# Altium PCB RX_137.PcbDoc
Units mm, origin at the board's own origin, x right, y up, seen from the top; angles counter-clockwise.
Board outline 69.85 x 63.5 mm, 2 copper layers (Top Layer, Bottom Layer); 57 components, 72 nets, 235 pads, 50 vias.
Unrouted connection lines stored in the file: 7.
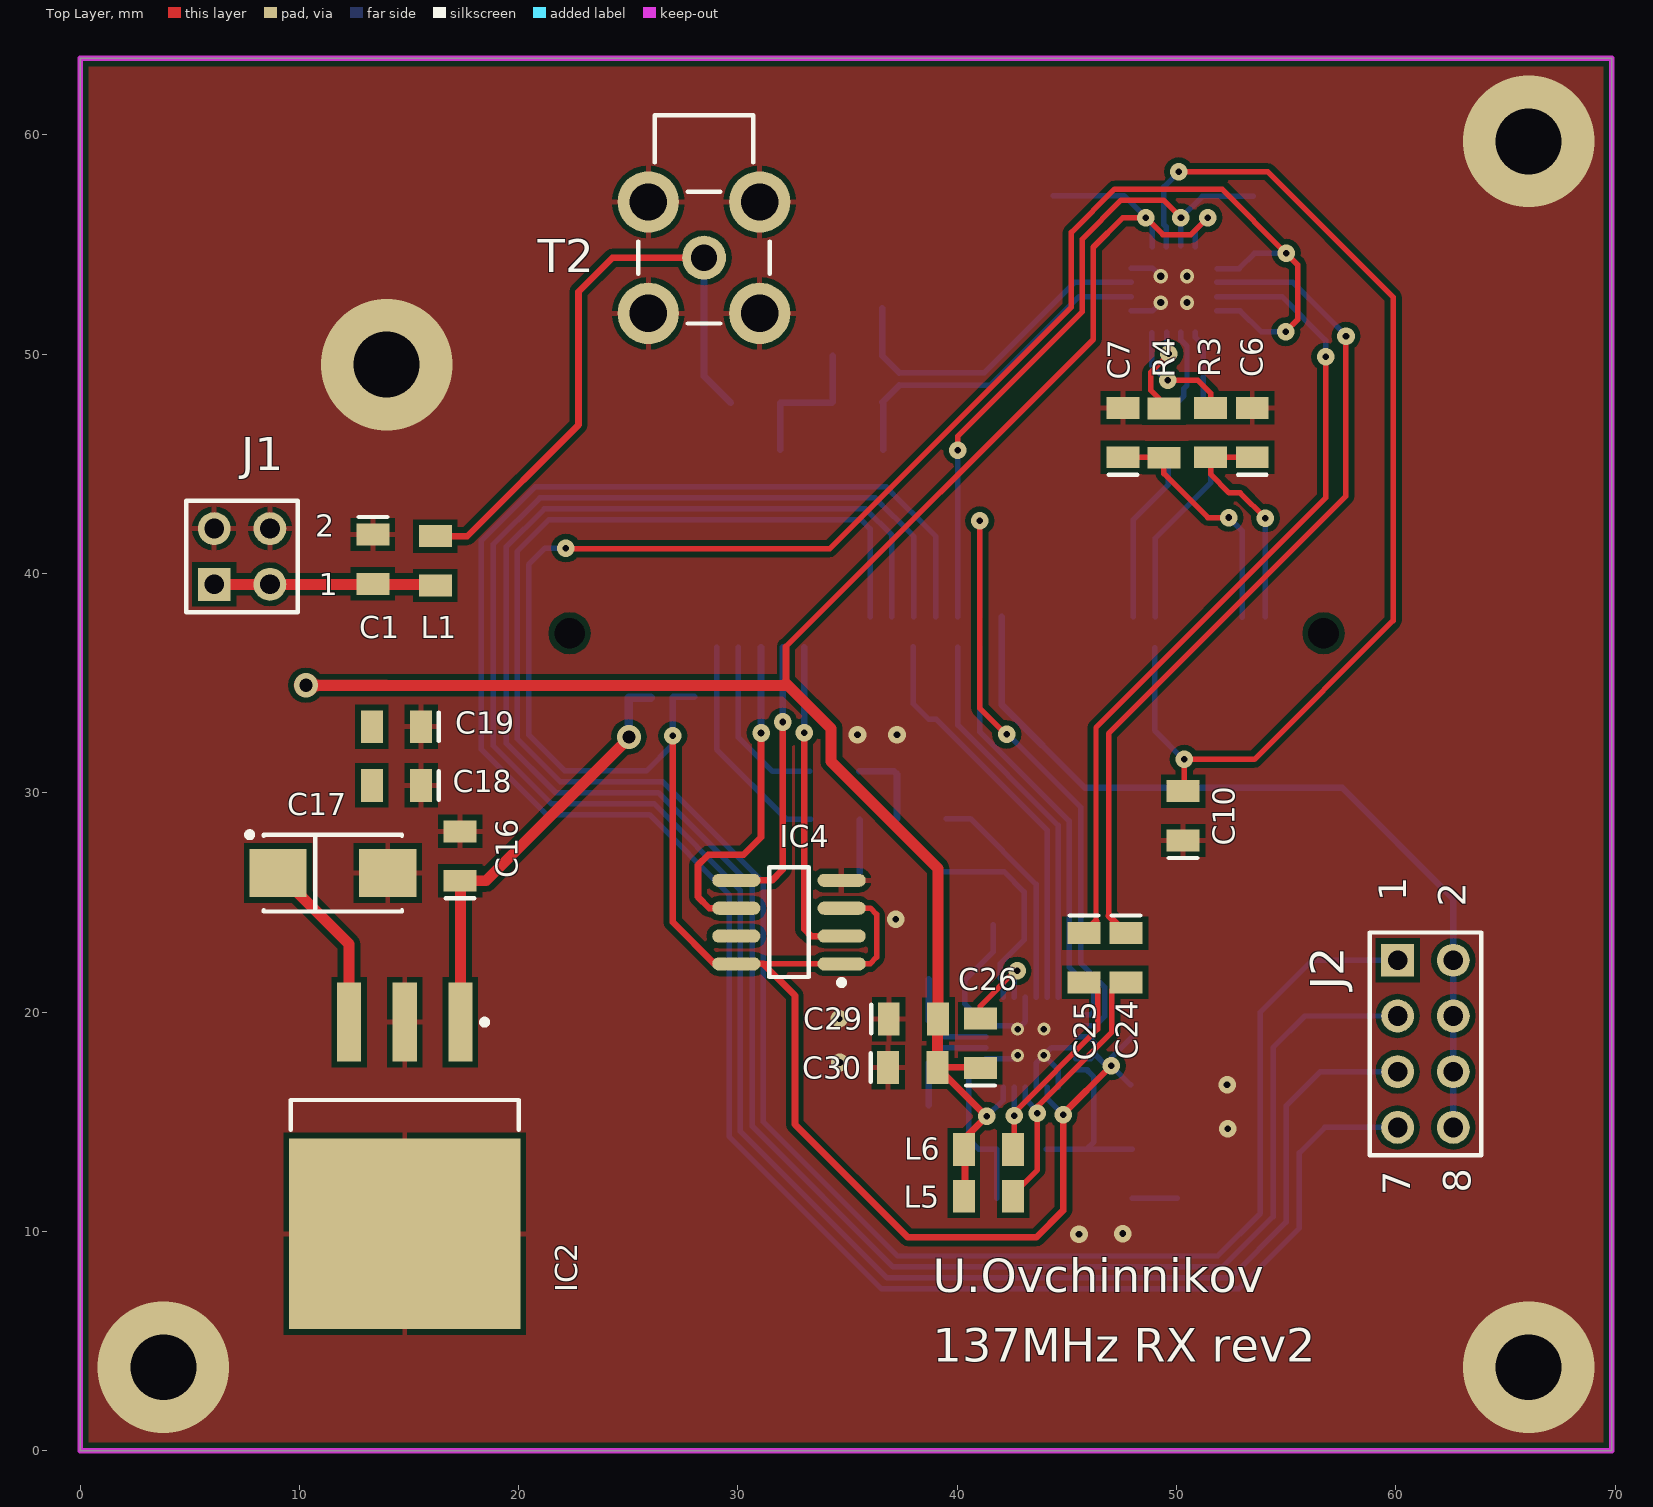
[diagram p0: Top Layer view]
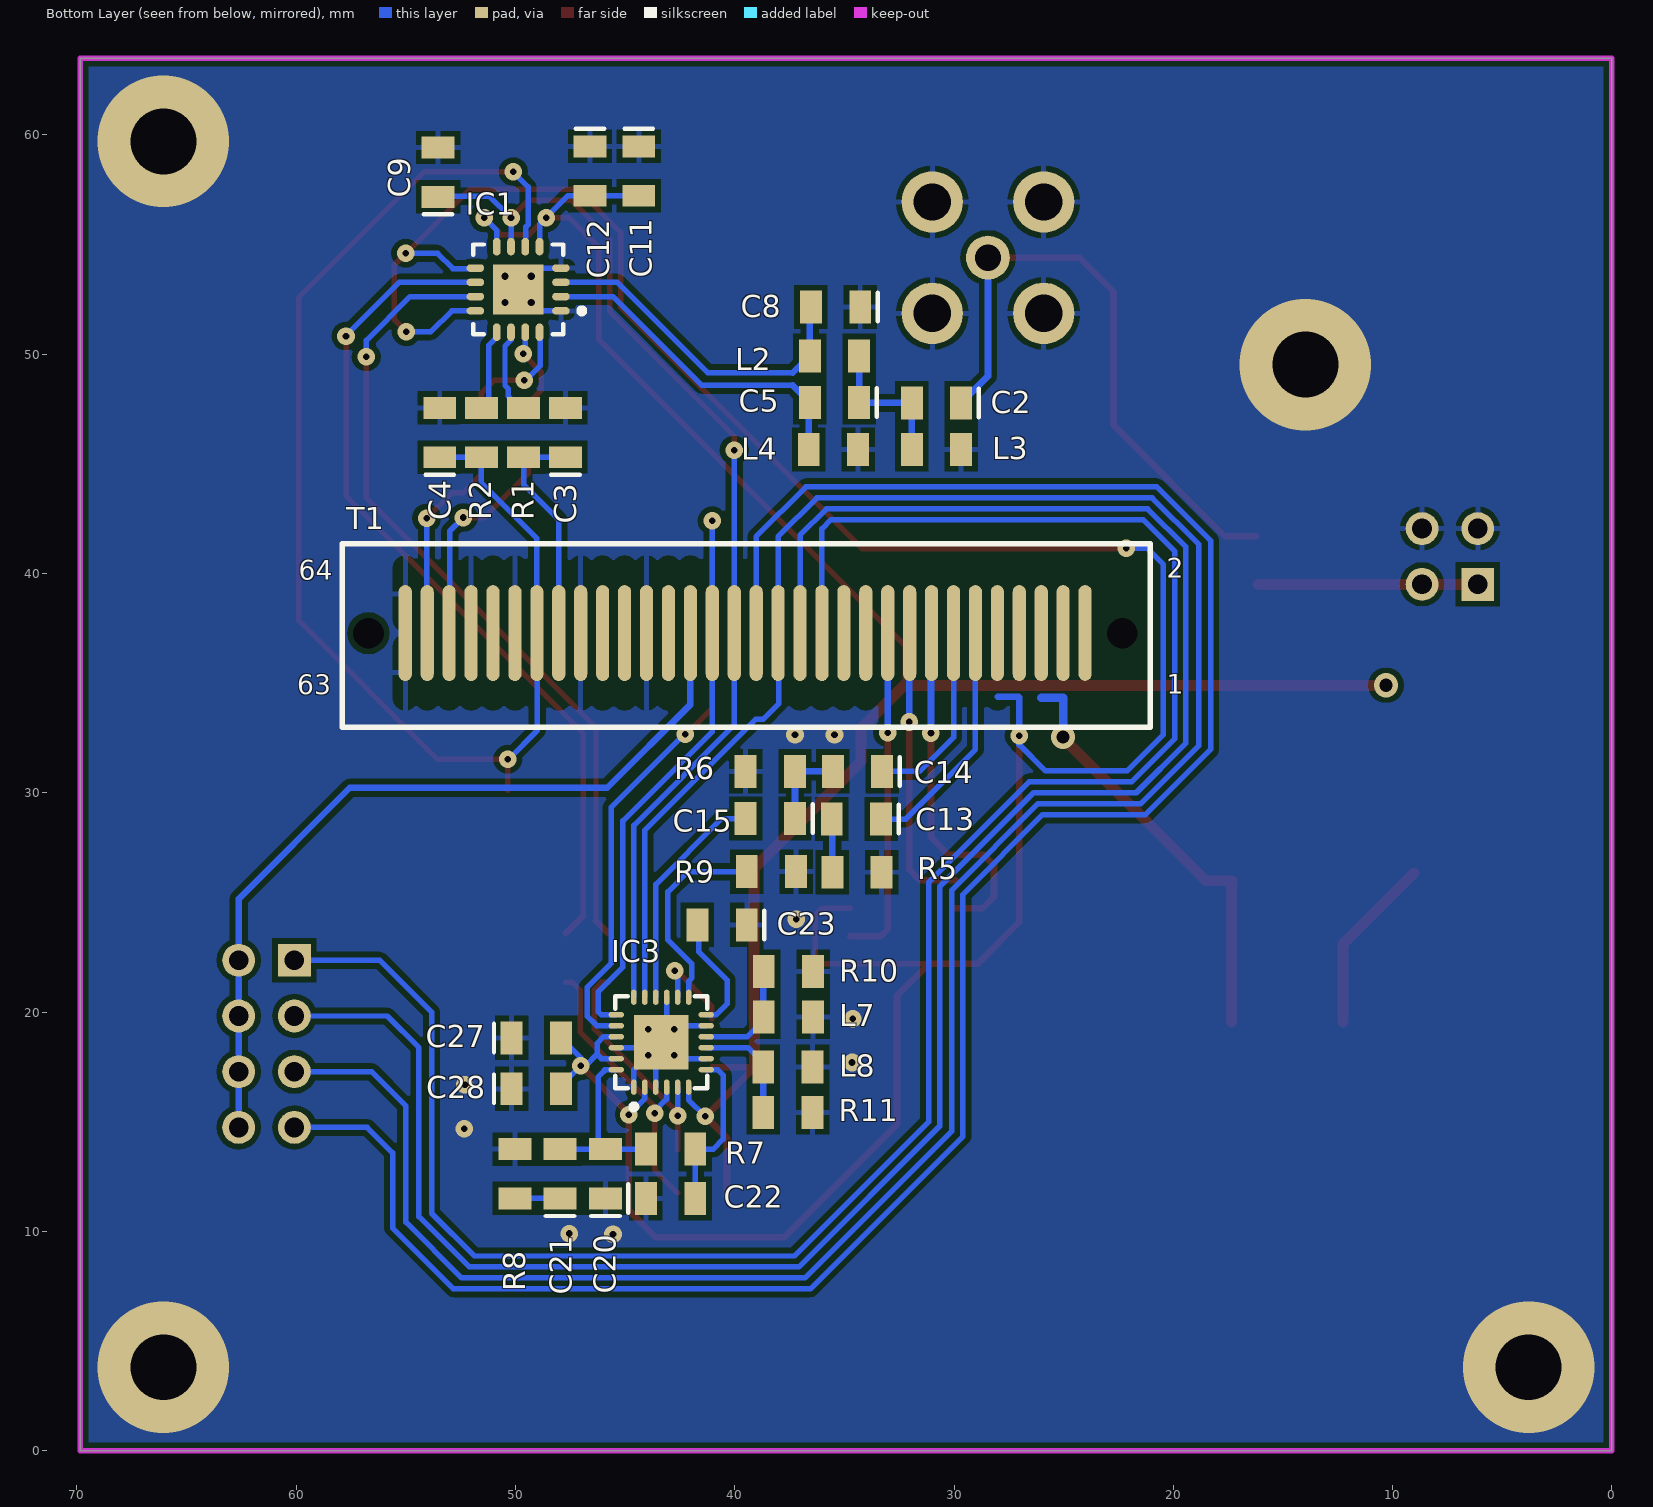
[diagram p1: Bottom Layer view, seen from below]
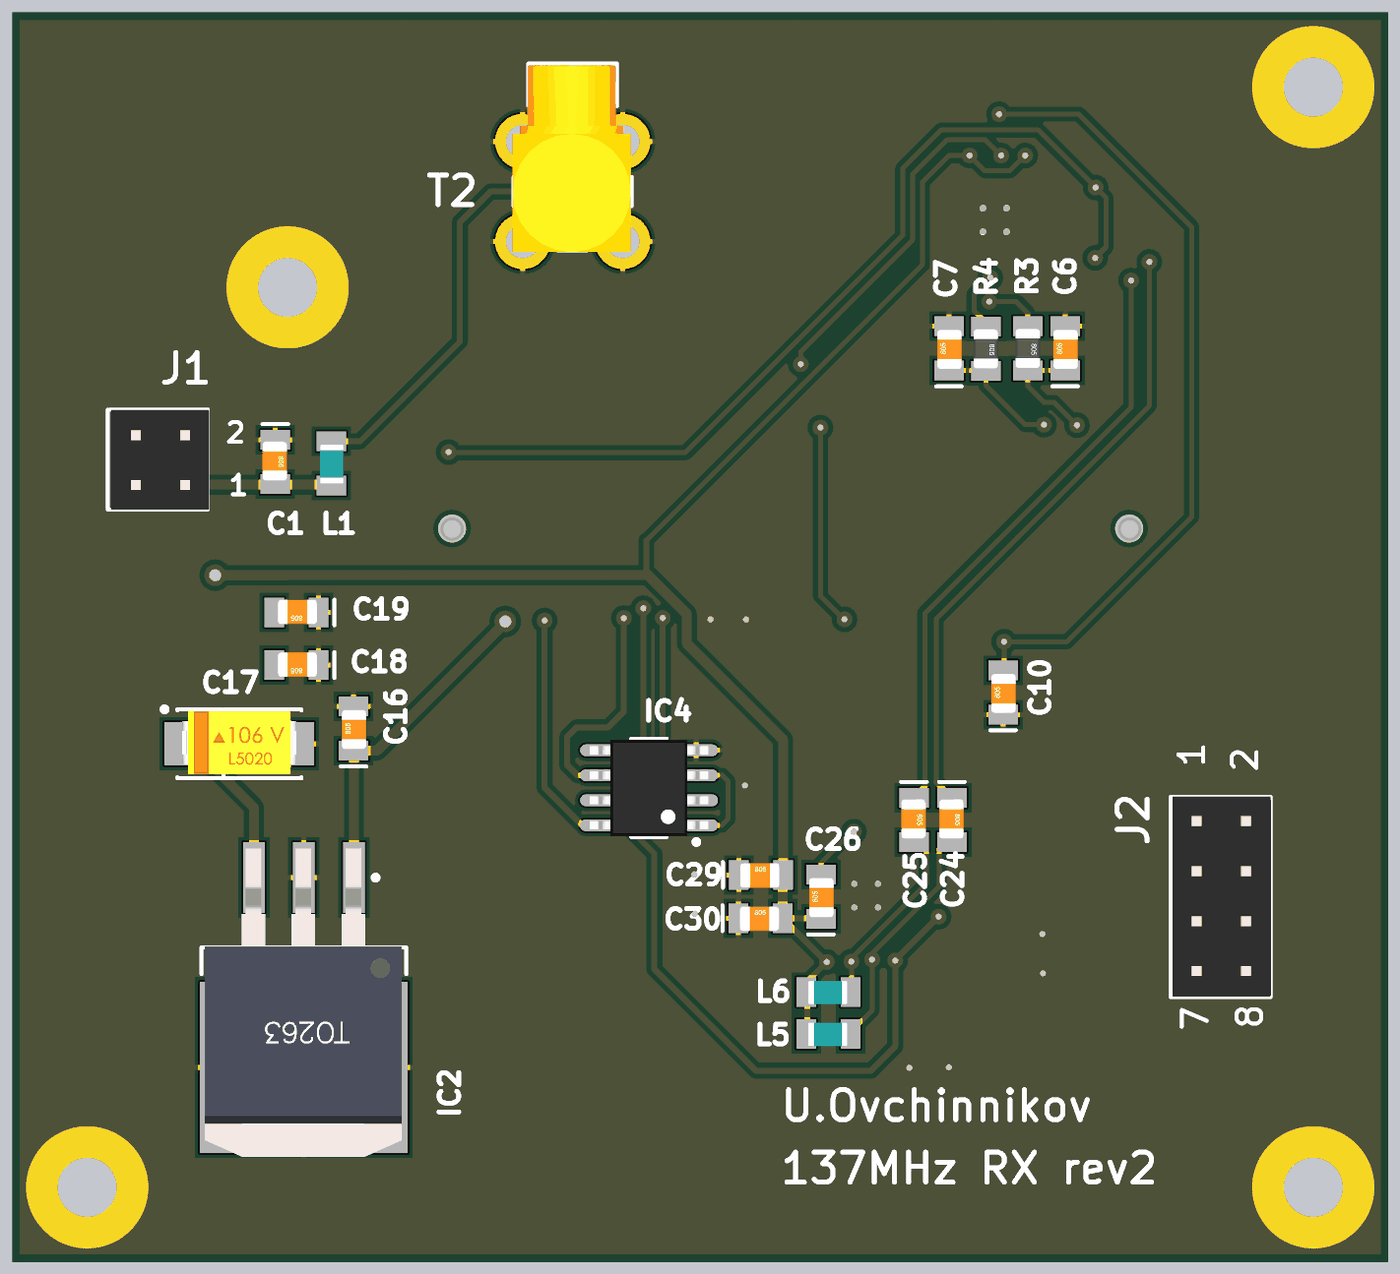
[diagram p2: 3D render of the assembled board from above, using the file's embedded part models]
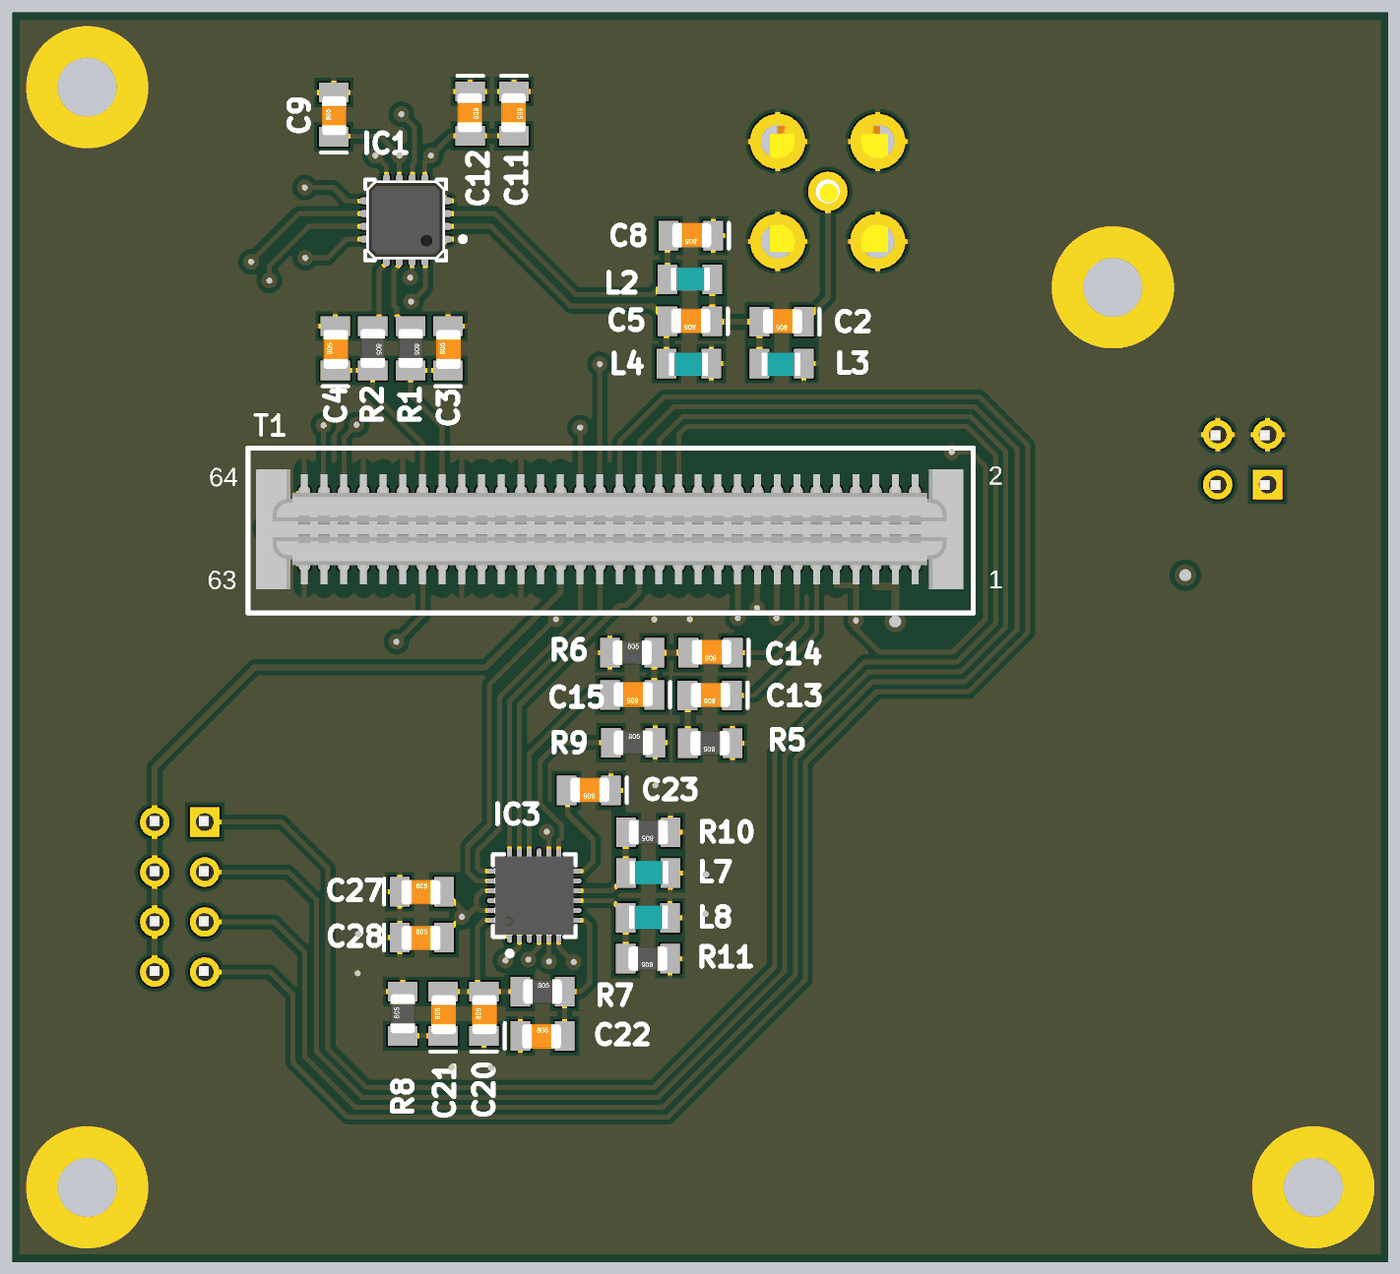
[diagram p3: 3D render of the assembled board from below, using the file's embedded part models]

## Layer stack, top to bottom
Top Solder: solder mask 0.0102, Solder Resist, Dk 3.5
Top Layer: signal copper 0.0356
Dielectric 1: dielectric 0.32, FR-4, Dk 4.8
Bottom Layer: signal copper 0.0356
Bottom Solder: solder mask 0.0102, Solder Resist, Dk 3.5

## Board outline
0,0 69.85,0 69.85,63.5 0,63.5

## Design rules (kind name [scope] priority, off if disabled: settings)
Clearance [All] p1: gap=0.25
PlaneClearance [All] p1: clearance=0.25
PlaneConnect [All] p1: planeconnectstyle=Relief reliefexpansion=0.3 reliefentries=4 reliefconductorwidth=0.35 reliefairgap=0.25
PolygonConnect Via [isVia] p1: connectstyle=Direct reliefconductorwidth=0.254 reliefentries=4 polygonreliefangle="90 Angle" airgapwidth=0.254
PolygonConnect [All] p2: connectstyle=Relief reliefconductorwidth=0.25 reliefentries=4 polygonreliefangle="90 Angle" airgapwidth=0.25
RoutingVias RoutingVias_1 [All] p1: holewidth=0.3 width=0.7 viastyle="Through Hole" minholewidth=0.3 minwidth=0.7 maxholewidth=0.6 maxwidth=1
RoutingVias Power [InNetClass('Power')] p2: holewidth=0.5 width=0.8 viastyle="Through Hole" minholewidth=0.3 minwidth=0.7 maxholewidth=0.6 maxwidth=1
SolderMaskExpansion [All] p1: expansion=0.102
Width [InNetClass('Power')] p1: maxlimit=0.5 minlimit=0.25 preferedwidth=0.4 minimp=50.000000 maximp=50.000000 favimp=50.000000
Width def [All] p2: maxlimit=0.3 minlimit=0.25 preferedwidth=0.25 minimp=50.000000 maximp=50.000000 favimp=50.000000
28 further rules are at their usual default settings.

## Classes and differential pairs
net class Power: "3_3V RF:1" 6V:1 AGND:1 NetC1_2 NetC2_1

## Components (designator, comment, footprint, x,y, rotation, side; value= is the part's Value field where it differs from the comment)
C1 "1uF" "0805 cap" 13.35,40.675 r270 top
C2 "220pF" "0805 cap" 30.775,47.775 r0 bottom
C3 "220pF" "0805 cap" 47.725,46.4 r90 bottom
C4 "220pF" "0805 cap" 53.45,46.4 r90 bottom
C5 "10,6pF" "0805 cap" 35.425,47.8 r0 bottom
C6 "220pF" "0805 cap" 53.45,46.4 r90 top
C7 "220pF" "0805 cap" 47.55,46.4 r90 top
C8 "10,6pF" "0805 cap" 35.375,52.15 r0 bottom
C9 "220pF" "0805 cap" 53.525,58.275 r90 bottom
C10 "1,5nF" "0805 cap" 50.3,28.925 r90 top
C11 "1uF" "0805 cap" 44.375,58.375 r270 bottom
C12 "1nF" "0805 cap" 46.6,58.375 r270 bottom
C13 "1000pF" "0805 cap" 34.425,28.8 r0 bottom
C14 "1000pF" "0805 cap" 34.375,30.975 r0 bottom
C15 "1000pF" "0805 cap" 38.35,28.825 r0 bottom
C16 "0,1uF" "0805 cap" 17.328,27.087 r90 top
C17 "22uF" "capacitor C" 11.528,26.337 r0 top
C18 "0,1uF" "0805 cap" 14.453,30.337 r180 top
C19 "220pF" "0805 cap" 14.453,33.012 r180 top
C20 "47pF" "0805 cap" 45.9,12.6 r90 bottom
C21 "680pF" "0805 cap" 47.975,12.6 r90 bottom
C22 "22nF" "0805 cap" 42.95,11.5 r180 bottom
C23 "1nF" "0805 cap" 40.55,23.975 r0 bottom
C24 "100pF" "0805 cap" 47.7,22.5 r270 top
C25 "100pF" "0805 cap" 45.775,22.5 r270 top
C26 "10uF" "0805 cap" 41.05,18.55 r90 top
C27 "1uF" "0805 cap" 49.075,18.825 r180 bottom
C28 "1nF" "0805 cap" 49.075,16.5 r180 bottom
C29 "1uF" "0805 cap" 37.975,19.675 r0 top
C30 "1nF" "0805 cap" 37.95,17.475 r0 top
IC1 "LT5506" QFN65P400X400X80-16N 49.875,52.95 r0 bottom
IC2 "LM3940" TO-263 14.803,15.937 r270 top
IC3 "ADF4360-8" QFN50P408X408X100-24N 43.35,18.625 r90 bottom
IC4 "24lc024" SOIC_SN8 32.325,24.1 r180 top
J1 "header 2x2" "pld 2x2" 7.375,40.775 r0 top
J2 "header 4x2" H_4x2 61.35,21.1 r270 top
L1 "479nH" "inductor 0805" 16.2,40.55 r90 top
L2 "106nH" "inductor 0805" 35.425,49.925 r0 bottom
L3 "479nH" "inductor 0805" 30.825,45.65 r180 bottom
L4 "106nH" "inductor 0805" 35.525,45.65 r180 bottom
L5 "56nH" "inductor 0805" 41.4,11.6 r0 top
L6 "56nH" "inductor 0805" 41.4,13.725 r0 top
L7 "68nH" "inductor 0805" 37.525,19.775 r0 bottom
L8 "68nH" "inductor 0805" 37.55,17.5 r0 bottom
R1 "51R" "0805 resistor" 49.625,46.45 r270 bottom
R2 "51R" "0805 resistor" 51.55,46.45 r270 bottom
R3 "51R" "0805 resistor" 51.55,46.45 r270 top
R4 "51R" "0805 resistor" 49.425,46.425 r270 top
R5 "50" "0805 resistor" 34.4,26.375 r0 bottom
R6 "50" "0805 resistor" 38.4,30.975 r180 bottom
R7 "15k" "0805 resistor" 42.95,13.75 r180 bottom
R8 "6,8k" "0805 resistor" 50.025,12.6 r90 bottom
R9 "4,7k" "0805 resistor" 38.35,26.4 r180 bottom
R10 "479R" "0805 resistor" 37.525,21.85 r0 bottom
R11 "470R" "0805 resistor" 37.55,15.425 r0 bottom
T1 "Female 64 pin" "64pin female Mezzanine" 39.475,37.425 r0 bottom
T2 "mcx_connect" mcx_ra 28.45,54.4 r270 top

## Footprints (in the part's own frame and the unit in brackets; to place one, negate y for a bottom-side part, rotate by r counter-clockwise, add the part's x,y. Pads: shape width x height; smd on the part's side, far side on the other; paste and mask are expansions set on the pad)
"64pin female Mezzanine" [mm]
  round 0 hole 1.4: 0(-17.15,0.15) 0(17.225,0.15)
  oval 0.6x3 smd: 1(-15.45,0.825) 3(-14.452,0.832) 5(-13.454,0.832) 7(-12.453,0.832) 9(-11.452,0.832) 11(-10.454,0.832) 13(-9.453,0.832) 15(-8.452,0.832) 17(-7.454,0.832) 19(-6.453,0.832) 21(-5.453,0.832) 23(-4.452,0.832) 25(-3.454,0.832) 27(-2.453,0.832) 29(-1.452,0.832) 31(-0.454,0.832) 33(0.547,0.832) 35(1.548,0.832) 37(2.546,0.832) 39(3.547,0.832) 41(4.547,0.832) 43(5.548,0.832) 45(6.546,0.832) 47(7.547,0.832) 49(8.548,0.832) 51(9.546,0.832) 53(10.547,0.832) 55(11.548,0.832) 57(12.546,0.832) 59(13.547,0.832) 61(14.547,0.832) 63(15.548,0.832)
  oval 0.6x3 smd paste+0: 2(-15.453,-0.547) 4(-14.452,-0.547) 6(-13.454,-0.547) 8(-12.453,-0.547) 10(-11.452,-0.547) 12(-10.454,-0.547) 14(-9.453,-0.547) 16(-8.452,-0.547) 18(-7.454,-0.547) 20(-6.453,-0.547) 22(-5.453,-0.547) 24(-4.452,-0.547) 26(-3.454,-0.547) 28(-2.453,-0.547) 30(-1.452,-0.547) 32(-0.454,-0.547) 34(0.547,-0.547) 36(1.548,-0.547) 38(2.546,-0.547) 40(3.547,-0.547) 42(4.547,-0.547) 44(5.548,-0.547) 46(6.546,-0.547) 48(7.547,-0.547) 50(8.548,-0.547) 52(9.546,-0.547) 54(10.547,-0.547) 56(11.548,-0.547) 58(12.546,-0.547) 60(13.547,-0.547) 62(14.547,-0.547) 64(15.548,-0.547)
  silkscreen extent -18.41,-3.94 18.41,4.44, body extent -17.9,-2.87 18,3.23, height 5.31
"0805 cap" [mm]
  rect 1x1.5 smd: 1(-1.1,0) 2(1.15,0)
  silkscreen extent -1.9,-0.65 -1.9,0.65, body extent -1.03,-0.65 0.97,0.6, height 0.78
"0805 resistor" [mm]
  rect 1x1.5 smd: 1(-1.1,0) 2(1.15,0)
  body extent -0.97,-0.63 1.03,0.62, height 0.78
"capacitor C" [mm]
  rect 2.6x2.2 smd: 1(-2.5,0) 2(2.5,0)
  silkscreen extent -3.92,-1.75 3.15,1.87, body extent -2.9,-1.55 2.9,1.65, height 2.6
H_4x2 [mm]
  rect 1.5x1.5 hole 0.9: 1(-1.26,-1.27)
  round 1.5 hole 0.9: 2(-1.26,1.27) 3(1.28,-1.27) 4(1.28,1.27) 5(3.82,-1.27) 6(3.82,1.27) 7(6.36,-1.27) 8(6.36,1.27)
  silkscreen extent -2.53,-2.54 7.63,2.54, body extent -2.56,-2.45 7.6,2.55, height 8.5
"inductor 0805" [mm]
  rect 1x1.5 smd: 1(-1.1,0) 2(1.15,0)
  body extent -1,-0.63 1,0.57, height 1.3
mcx_ra [mm]
  round 2 hole 1.2: 1(0,0)
  round 2.8 hole 1.7: 2(-2.54,-2.54) 3(2.54,-2.54) 4(2.54,2.54) 5(-2.54,2.54)
  silkscreen extent -6.5,-3 3,3, body extent -6.43,-3.05 3.07,2.95, height 5.9
"pld 2x2" [mm]
  rect 1.5x1.5 hole 0.9: 1(-1.26,-1.27)
  round 1.5 hole 0.9: 2(-1.26,1.27) 3(1.28,-1.27) 4(1.28,1.27)
  silkscreen extent -2.53,-2.54 2.55,2.54, body extent -2.37,-2.55 2.63,2.53, height 8.5
QFN50P408X408X100-24N [mm] "QFN, 24-Leads, Body 4,2x4,2mm (max), Pitch 0,50mm, IPC Medium Density"
  oval 0.7x0.25 smd: 1(-2.05,1.25) 2(-2.05,0.75) 3(-2.05,0.25) 4(-2.05,-0.25) 5(-2.05,-0.75) 6(-2.05,-1.25) 13(2.05,-1.25) 14(2.05,-0.75) 15(2.05,-0.25) 16(2.05,0.25) 17(2.05,0.75) 18(2.05,1.25)
  oval 0.25x0.7 smd: 7(-1.25,-2.05) 8(-0.75,-2.05) 9(-0.25,-2.05) 10(0.25,-2.05) 11(0.75,-2.05) 12(1.25,-2.05) 19(1.25,2.05) 20(0.75,2.05) 21(0.25,2.05) 22(-0.25,2.05) 23(-0.75,2.05) 24(-1.25,2.05)
  rect 2.5x2.5 smd: 25(0,0)
  silkscreen extent -3.07,-2.1 2.1,2.1, body extent -2,-2 2,2, height 1
QFN65P400X400X80-16N [mm] "QFN, 16-Leads, Body 4,1x4,1mm (max), Pitch 0,65mm, IPC Medium Density"
  oval 0.8x0.35 smd: 1(-1.95,0.975) 2(-1.95,0.325) 3(-1.95,-0.325) 4(-1.95,-0.975) 9(1.95,-0.975) 10(1.95,-0.325) 11(1.95,0.325) 12(1.95,0.975)
  oval 0.35x0.8 smd: 5(-0.975,-1.95) 6(-0.325,-1.95) 7(0.325,-1.95) 8(0.975,-1.95) 13(0.975,1.95) 14(0.325,1.95) 15(-0.325,1.95) 16(-0.975,1.95)
  rect 2.3x2.3 smd: 17(0,0)
  silkscreen extent -3.02,-2.05 2.05,2.05, body extent -2.05,-2.05 2.05,2.05, height 0.85
SOIC_SN8 [mm]
  oval 2.2x0.6 smd: 1(-2.4,1.905) 2(-2.4,0.635) 3(-2.4,-0.635) 4(-2.4,-1.905) 5(2.4,-1.905) 6(2.4,-0.635) 7(2.4,0.635) 8(2.4,1.905)
  silkscreen extent -2.53,-2.5 0.9,2.88, body extent -3,-2.45 3,2.45, height 1.75
TO-263 [mm]
  rect 3.6x1.1 smd: 1(-3.6,2.54) 2(-3.6,0) 3(-3.6,-2.54)
  rect 8.7x10.55 smd: 4(6.05,0)
  silkscreen extent -3.72,-5.2 1.3,5.2, body extent -5.08,-5.2 10.59,5.2, height 4.86

## Part data
C1 C2 C3 C4 C5 C6 C7 C8 C9 C10 C11 C12 C13 C14 C15 C16 C18 C19 C20 C21 C22 C23 C24 C25 C26 C27 C28 C29 C30: library part "ceramic capacitor"
C17: library part "tantalum capacitor"
IC1: "40MHz to 500MHz  Quadrature Demodulator  with VGA"
IC3: "Integrated Synthesizer and VCO"
L1 L2 L3 L4 L5 L6 L7 L8: library part inductor
R1 R2 R3 R4 R5 R6 R7 R8 R9 R10 R11: library part resistor

## Via types
v1: diameter 0.8, hole 0.3, Top Layer to Bottom Layer, tented both sides, 36 vias
v2: diameter 0.66, hole 0.33, Top Layer to Bottom Layer, tented top, 4 vias
v3: diameter 0.6, hole 0.3, Top Layer to Bottom Layer, tented top, 4 vias
v4: diameter 6, hole 3, Top Layer to Bottom Layer, 4 vias
v5: diameter 1.1, hole 0.6, Top Layer to Bottom Layer, tented both sides, 2 vias

## Nets (pads, with @x,y where several pads share a name; then routed paths per layer and width w, separated by ;. In a path a pad name is that pad's centre, name@x,y a point inside that pad or via, vN(x,y) a via of type N, cw(c..) or ccw(c..) an arc to the next point about the centre after c; other vN are vias at no path point)
"3_3V RF:1": C11.2 C12.2 C17.1 C18.2 C19.2 C26.1 C29.2 C30.2 IC1.5 IC1.8 IC2.3 IC3.6 L5.1 L6.1 | length 100.8
  Top Layer w0.25: 32.187,36.662 46.2,50.675 46.2,54.875 47.55,56.225 v1(48.6,56.225) 49.375,55.45 50.65,55.45 v1(51.425,56.225)
  Top Layer w0.3: 32.187,34.987 32.187,36.662 ; L5.1@40.35,11.6 40.35,14.25 41.338,15.238 C30.2 C26.1@41.025,17.475
  Top Layer w0.5: C17.1 12.263,23.102 IC2.3 ; v5(10.3,34.9) 32.1,34.9 ; 32.187,34.987 34.25,32.925 34.25,31.425 39.125,26.55 C29.2 ; C30.2 C29.2@39.1,19.65
  Bottom Layer w0.25: v1(41.35,15.25) 42.1,16 IC3.6 ; C11.2 C12.2 47.6,57.225 v1(48.6,56.225) 48.9,55.925 IC1.5 ; IC1.8 50.85,55.65 v1(51.425,56.225)
6V:1: C16.1 IC2.1 T1.3 T1.5 | length 19.7
  Top Layer w0.3: v5@25.025,32.5 v5(25.025,32.55)
  Top Layer w0.5: IC2.1 17.343,25.972 C16.1 18.512,25.987 v5@25.025,32.5
  Bottom Layer w0.3: v5@25.023,32.548 25.022,32.55 v5(25.025,32.55)
  Bottom Layer w0.4: v5@25.023,32.548 25.023,34.331 26.021,34.331
AGND:1: C1.1 C3.2 C4.2 C6.2 C7.2 C8.1 C9.2 C10.1 C11.1 C12.1 C16.2 C17.2 C18.1 C19.1 C20.1 C22.1 C23.1 C27.1 C28.1 C29.1 C30.1 IC1.1 IC1.4 IC1.17 IC2.2 IC2.4 IC3.1 IC3.3 IC3.8 IC3.11 IC3.15 IC3.22 IC3.25 IC4.4 J1.2 J1.4 L3.2 L4.2 L7.1 L8.1 R5.1 R6.1 R8.2 R9.2 R10.1 R11.1 T1.41 T1.42 T1.47 T1.48 T1.54 T1.58 T1.63 T1.64 T2.2 T2.3 T2.4 T2.5 | length 12.5
  Bottom Layer w0.25: IC3.8 42.6,17.875 v3(42.75,18.025) ; IC3.11 42.6,19.375 v3(42.75,19.225) 43.1,19.575 IC3.15 ; IC3.3 43.6,17.675 v3(43.95,18.025) ; IC3.1 44.6,17.375 v3(43.95,18.025) ; IC3.22 44.3,18.375 v3(43.95,18.025) ; IC1.1 48.9,51.975 v2(49.275,52.35) ; IC1.4 48.9,53.925 v2(49.275,53.55)
  other v1: 45.55,9.875 47.55,9.9 52.325,14.675 52.3,16.675 34.65,17.7 34.625,19.7 37.2,24.225 35.45,32.65 37.25,32.65
  other v2: 50.475,52.35 50.475,53.55
  other v3: 43.95,19.225
  other v4: 3.8,3.8 66.05,3.8 13.975,49.525 66.05,59.7
AUX_ADC_A1: T1.59
AUX_ADC_B1: T1.61
AUX_ADC_REF: T1.57
AUX_DAC_A: C10.2 IC1.6 T1.51 | length 49.8
  Top Layer w0.25: v1(50.1,58.325) 54.15,58.325 59.875,52.6 59.875,37.85 53.55,31.525 v1(50.35,31.525) C10.2@50.35,30.125
  Bottom Layer w0.25: T1.51@49,36.621 49,32.85 v1@50.325,31.525 ; IC1.6@49.525,54.9 49.525,55.804 49.425,55.904 49.425,57.625 v1@50.1,58.3
AUX_DAC_B: T1.53
AUX_DAC_C: T1.55
AUX_DAC_D: T1.49
AVDD:1: T1.43 T1.44 T1.45 T1.46
CLK: C15.2 IC3.16 | length 10.5
  Bottom Layer w0.25: C15.2 40.6,28.825 43.6,25.825 IC3.16
CLK_A: C25.1 IC1.11 | length 37.4
  Top Layer w0.25: 46.325,24.15 46.325,32.975 56.8,43.45 v1(56.8,49.875)
  Top Layer w0.3: C25.1 46.325,24.15
  Bottom Layer w0.25: IC1.11 54.8,52.625 56.8,50.625 v1(56.8,49.875)
CLK_B: C24.1 IC1.10 | length 38.9
  Top Layer w0.25: 46.9,24.4 46.9,32.7 57.725,43.525 v1(57.725,50.825)
  Top Layer w0.3: 46.9,24.4 C24.1
  Bottom Layer w0.25: IC1.10 55.3,53.275 v1@57.725,50.85
CLOCK_N: C14.1 T1.13 | length 8
  Bottom Layer w0.25: T1.13@30.022,36.643 30.022,32.528 31.575,30.975 C14.1
CLOCK_P: C13.1 T1.11 | length 10.3
  Bottom Layer w0.25: T1.11@29.021,36.643 29.021,31.979 32.2,28.8 C13.1
CP: C20.2 C21.2 IC3.24 R7.1 | length 8.3
  Bottom Layer w0.25: R7.1 C21.2 ; IC3.24 45.925,17.375 45.95,17.35 45.95,17.304 46.225,17.029 46.225,14.075 C20.2
DGND:1: J2.2 J2.4 J2.6 J2.8 T1.37 T1.38 | length 38.7
  Bottom Layer w0.3: T1.38@42.021,38.022 42.021,36.643 42.021,34.021 45.817,30.225 57.55,30.225 62.62,25.155 J2.2 J2.4 J2.6 J2.8
DGND_NC: T1.1 T1.2
DVDD:3.3: C27.2 C28.2 IC1.9 IC1.12 IC3.2 IC3.21 IC3.23 IC4.1 IC4.3 IC4.8 T1.7 T1.9 | length 136.3
  Top Layer w0.25: v1@22.15,41.125 34.175,41.125 45.2,52.15 45.2,55.55 47.175,57.525 52.075,57.525 v1(55,54.6) 55.525,54.075 55.525,51.575 v1(54.975,51.025) ; IC4.8 IC4.1 36.02,22.195 36.325,22.5 36.325,24.45 36.04,24.735 IC4.3
  Top Layer w0.3: v1(27.025,32.6) 27.025,24.1 28.93,22.195 IC4.8 31.155,22.195 32.6,20.75 32.6,14.875 37.75,9.725 43.6,9.725 44.825,10.95 44.825,15.35 v1(47.025,17.55)
  Bottom Layer w0.25: v1(22.15,41.157) 21.207,41.157 20.45,40.4 20.45,32.653 22.103,31 25.825,31 27.025,32.2 ; IC3.2 44.1,16.05 v1(44.825,15.325) ; IC3.23 46.075,17.875 46.275,18.075 ; IC3.21 45.975,18.875 46.275,18.575 46.275,18.075 ; C28.2@47.9,16.675 v1(47.025,17.55) ; C27.2 47.025,17.925 v1(47.025,17.55) ; IC1.12 52.9,51.975 53.85,51.025 v1(54.975,51.025) ; IC1.9@51.85,53.9 52.85,53.9 53.55,54.6 v1(55,54.6) ; 46.275,18.075 46.8,17.55 v1(47.025,17.55)
  Bottom Layer w0.3: 27.025,32.2 v1(27.025,32.6) 27.025,34.35 27.05,34.375 28,34.375
I2C_A0: T1.21
I2C_A1: IC4.2 T1.19 | length 14.7
  Top Layer w0.3: v1(33.022,32.728) 33.022,23.778 33.335,23.465 IC4.2
  Bottom Layer w0.3: v1(33.022,32.728) T1.19@33.022,36.643
IF+: C5.2 IC1.2 L4.1 | length 15.4
  Bottom Layer w0.25: 37.35,48.575 41.5,48.575 45.55,52.625 IC1.2
  Bottom Layer w0.3: C5.2 37.35,48.575 ; L4.1 C5.2@36.625,47.75
IF-: C8.2 IC1.3 L2.2 | length 15.6
  Bottom Layer w0.25: 37.35,49.15 41.225,49.15 45.35,53.275 IC1.3
  Bottom Layer w0.3: C8.2@36.575,52.1 L2.2 37.35,49.15
IO_RX_0: IC3.20 T1.36 | length 30.9
  Top Layer w0.25: v1(41.025,42.4) 41.025,33.85 42.215,32.66 v1(42.25,32.66)
  Bottom Layer w0.25: T1.36@41.023,38.022 v1@41.023,42.4 ; v1(42.25,32.66) 42.315,32.66 45.625,29.351 45.625,22.226 46.725,21.126 46.725,19.814 46.286,19.375 IC3.20
IO_RX_1: C9.1 IC1.7 T1.34 | length 30.1
  Top Layer w0.25: v1(40.025,45.625) 40.025,46.268 45.7,51.943 45.7,55.25 47.475,57.025 49.4,57.025 v1(50.2,56.225)
  Bottom Layer w0.25: T1.34@40.025,38.022 v1(40.025,45.625) ; IC1.7@50.2,54.95 v1(50.2,56.225) 51.175,57.2 C9.1@53.5,57.2
IO_RX_2: J2.7 T1.32 | length 99.3
  Bottom Layer w0.25: T1.32@39.021,38.022 39.021,41.679 36.75,43.95 20.754,43.95 18.3,41.496 18.3,31.975 21.275,29 25.954,29 29.6,25.354 29.6,14.325 36.55,7.375 52.825,7.375 55.6,10.15 55.6,13.575 56.765,14.74 J2.7
IO_RX_3: J2.5 T1.30 | length 98.4
  Bottom Layer w0.25: T1.30@38.023,38.022 38.023,41.677 36.25,43.45 20.961,43.45 18.85,41.339 18.85,32.132 21.482,29.5 26.161,29.5 30.1,25.561 30.1,14.575 36.8,7.875 52.45,7.875 55,10.425 55,15.725 56.555,17.28 J2.5
IO_RX_4: J2.3 T1.28 | length 97.7
  Bottom Layer w0.25: T1.28@37.022,38.022 37.022,41.753 35.825,42.95 21.168,42.95 19.425,41.207 19.425,32.264 21.689,30 26.368,30 30.65,25.718 30.65,14.8 37.075,8.375 52.1,8.375 54.4,10.675 54.4,18.375 55.845,19.82 J2.3
IO_RX_5: J2.1 T1.26 | length 96.7
  Bottom Layer w0.25: T1.26@36.021,38.022 36.021,42.029 35.6,42.45 21.375,42.45 19.925,41 19.925,32.471 21.896,30.5 26.575,30.5 31.15,25.925 31.15,15.007 37.282,8.875 51.875,8.875 53.825,10.825 53.825,20 56.185,22.36 J2.1
IO_RX_6: T1.24
IO_RX_7: T1.22
IO_RX_8: T1.20
IO_RX_9: T1.18
IO_RX_10: T1.16
IO_RX_11: T1.14
IO_RX_12: T1.12
IO_RX_13: T1.10
IO_RX_14: T1.8
IO_RX_15: T1.6
NetC1_2: C1.2 J1.1 J1.3 L1.1 | length 10
  Top Layer w0.5: J1.1 J1.3 L1.1@16.145,39.505
NetC2_1: C2.1 L1.2 T2.1 | length 28.2
  Top Layer w0.3: L1.2 17.65,41.7 22.725,46.775 22.725,52.85 24.275,54.4 T2.1
  Bottom Layer w0.3: T2.1 28.45,49 C2.1
NetC2_2: C2.2 C5.1 L2.1 L3.1 | length 6.6
  Bottom Layer w0.3: L3.1 C2.2 C5.1@34.3,47.775 ; C5.1 L2.1
NetC13_2: C13.2 R5.2 | length 2.4
  Bottom Layer w0.3: R5.2 C13.2@35.55,28.775
NetC14_2: C14.2 C15.1 R6.2 | length 3.8
  Bottom Layer w0.3: C14.2 37.125,30.975 37.25,30.85 C15.1
NetC21_1: C21.1 R8.1 | length 2.1
  Bottom Layer w0.25: C21.1 R8.1
NetC23_2: C23.2 IC3.12 | length 5.3
  Bottom Layer w0.25: IC3.12 40.85,19.875 40.35,20.375 40.35,21.453 41.65,22.753 C23.2@41.65,23.975
NetC24_2: C24.2 IC3.4 L5.2 | length 13.3
  Top Layer w0.25: L5.2@42.6,11.75 43.65,12.8 43.65,15.7 47.05,19.1 47.05,21 47.4,21.35 C24.2
  Bottom Layer w0.25: IC3.4 43.1,16.025 43.652,15.473 v1(43.652,15.376)
NetC25_2: C25.2 IC3.5 L6.2 | length 10.9
  Top Layer w0.25: L6.2@42.6,13.725 v1(42.6,15.275) ; v1@42.6,15.315 42.6,15.42 46.4,19.22 46.4,21.025 46.075,21.35 C25.2
  Bottom Layer w0.25: v1(42.6,15.275) IC3.5
NetC26_2: C26.2 IC3.14 | length 4.1
  Top Layer w0.25: C26.2 41.05,20.275 v1@42.687,21.912
  Bottom Layer w0.25: IC3.14 42.6,21.749 v1(42.725,21.874)
NetIC1_13: IC1.13 R2.1 | length 3.6
  Bottom Layer w0.25: IC1.13 50.85,50.775 51.225,50.4 R2.1@51.225,47.55
NetIC1_14: IC1.14 R1.1 | length 4
  Bottom Layer w0.25: R1.1@49.704,47.471 50.327,48.095 50.327,48.431 50.475,48.579 50.475,50.371 50.2,50.646 IC1.14
NetIC1_15: IC1.15 R4.1 | length 4.2
  Top Layer w0.25: R4.1@49.625,47.55 48.827,48.348 48.827,49.177 49.65,50 v1(49.65,50.025)
  Bottom Layer w0.25: IC1.15 49.55,50.125 v1(49.65,50.025)
NetIC1_16: IC1.16 R3.1 | length 5.4
  Top Layer w0.25: v1(49.602,48.802) 50.973,48.802 51.55,48.225 R3.1
  Bottom Layer w0.25: IC1.16@48.875,50.975 48.875,49.47 49.543,48.802 v1(49.602,48.802)
NetIC3_9: IC3.9 L8.2 R11.2 | length 4.8
  Bottom Layer w0.25: L8.2@38.7,17.675 39.4,18.375 IC3.9
  Bottom Layer w0.3: R11.2@38.7,15.75 L8.2@38.7,17.675
NetIC3_10: IC3.10 L7.2 R10.2 | length 4.8
  Bottom Layer w0.25: L7.2@38.7,19.6 39.425,18.875 IC3.10
  Bottom Layer w0.3: L7.2@38.7,19.6 R10.2@38.7,21.5
NetIC3_13: IC3.13 R9.1 | length 9.4
  Bottom Layer w0.25: R9.1@39.4,26.4 42.125,26.4 43.05,25.475 43.05,23.295 41.95,22.195 41.95,21.553 42.1,21.403 IC3.13
RESET: T1.27
RS232_RXD: T1.25
RS232_TXD: T1.23
SCL: IC4.6 T1.15 | length 15.5
  Top Layer w0.3: IC4.6 28.69,24.735 28.175,25.25 28.175,26.7 28.65,27.175 30.25,27.175 31.05,27.975 v1(31.05,32.725)
  Bottom Layer w0.3: v1(31.05,32.725) T1.15@31.05,36.643
SCLK: IC3.17 T1.29 | length 18.7
  Bottom Layer w0.25: T1.29@38,36.65 38,34.05 38.7,33.35 39.05,33.35 44.1,28.3 IC3.17
SDA: IC4.5 T1.17 | length 12.5
  Top Layer w0.3: IC4.5 31.555,26.005 32.034,26.484 v1(32.034,33.226)
  Bottom Layer w0.3: v1(32.034,33.226) T1.17@32.034,36.629
SDI: IC3.18 T1.33 | length 17.9
  Bottom Layer w0.25: T1.33@40.022,36.643 40.022,33.085 44.6,28.507 IC3.18
SDO: T1.31
SEN_RX: IC3.19 T1.35 | length 19.7
  Bottom Layer w0.25: T1.35@41.023,36.643 41.023,32.792 45.1,28.714 45.1,22.044 46.225,20.919 46.225,20.021 46.079,19.875 IC3.19
VINN_A: C7.1 R4.2 T1.60 | length 11
  Top Layer w0.25: C7.1@47.725,45.3 R4.2@49.425,45.3 ; R4.2 49.425,44.55 51.425,42.55 v1(52.375,42.55)
  Bottom Layer w0.25: v1(52.375,42.55) 53,41.925 T1.60@53,38
VINN_B: C4.1 R2.2 T1.52 | length 10.2
  Bottom Layer w0.25: T1.52@49.021,38.022 49.021,41.596 51.55,44.125 R2.2 C4.1@53.425,45.3
VINP_A: C6.1 R3.2 T1.62 | length 10.5
  Top Layer w0.25: C6.1 R3.2 51.55,44.525 52.4,43.675 52.9,43.675 v1(54.05,42.525)
  Bottom Layer w0.25: T1.62@54.05,38.025 v1(54.05,42.525)
VINP_B: C3.1 R1.2 T1.50 | length 9.8
  Bottom Layer w0.25: C3.1 R1.2 49.625,44.05 48.023,42.448 T1.50@48.023,38.022
VREF: T1.56
VTUNE: C22.2 IC3.7 R7.2 | length 7.5
  Bottom Layer w0.25: IC3.7 40.775,17.375 40.525,17.125 40.525,14.2 40.975,13.75 R7.2 C22.2
pads on no net: IC4.7 T1.0 T1.4 T1.39 T1.40

## Polygon pours and split planes (outlines as drawn)
"3_3V RF:1" on Top Layer "Top Layer-3_3V RF:1" (solid, pour order 6): 6.25,25 6.25,33.75 9.5,37 14,37 14,28 11,25
AGND:1 on Top Layer "Top Layer-3_3V RF:1" (solid, remove dead copper, pour order 3): 0,63.5 69.85,63.5 69.85,0 0,0
AGND:1 on Bottom Layer "Top Layer-3_3V RF:1" (solid, remove dead copper, pour order 5): 0,63.5 69.85,63.5 69.85,0 0,0

## Keep-outs
Keep-Out Layer:
  the board outline again, w0.254

## Silkscreen, mask and mechanical layers (free items; w line width, h text height)
Top Overlay:
  text "U.Ovchinnikov" at 38.875,7.225 h1.52
  text "137MHz RX rev2" at 38.875,4.05 h1.52

## Text inside footprints (layer, text, board x,y; h text height)
J1: Top Overlay "2" at 10.725,41.675 h1; Top Overlay "1" at 10.875,39 h1
J2: Top Overlay "8" at 63.425,11.75 h1.27 r90; Top Overlay "7" at 60.65,11.65 h1.27 r90; Top Overlay "1" at 60.475,25.05 h1.27 r90; Top Overlay "2" at 63.175,24.8 h1.27 r90
T1: Bottom Overlay "63" at 59.95,34.2 h1.52; Bottom Overlay "64" at 59.875,39.425 h1.52; Bottom Overlay "1" at 20.3,34.225 h1.52; Bottom Overlay "2" at 20.3,39.5 h1.52